# Altium PCB Nixie_PCB.PcbDoc
Units mm, origin at the board's own origin, x right, y up, seen from the top; angles counter-clockwise.
Board outline 150 x 55 mm, 2 copper layers (Top Layer, Bottom Layer); 35 components, 121 nets, 337 pads, 172 vias.
Unrouted connection lines stored in the file: 6.
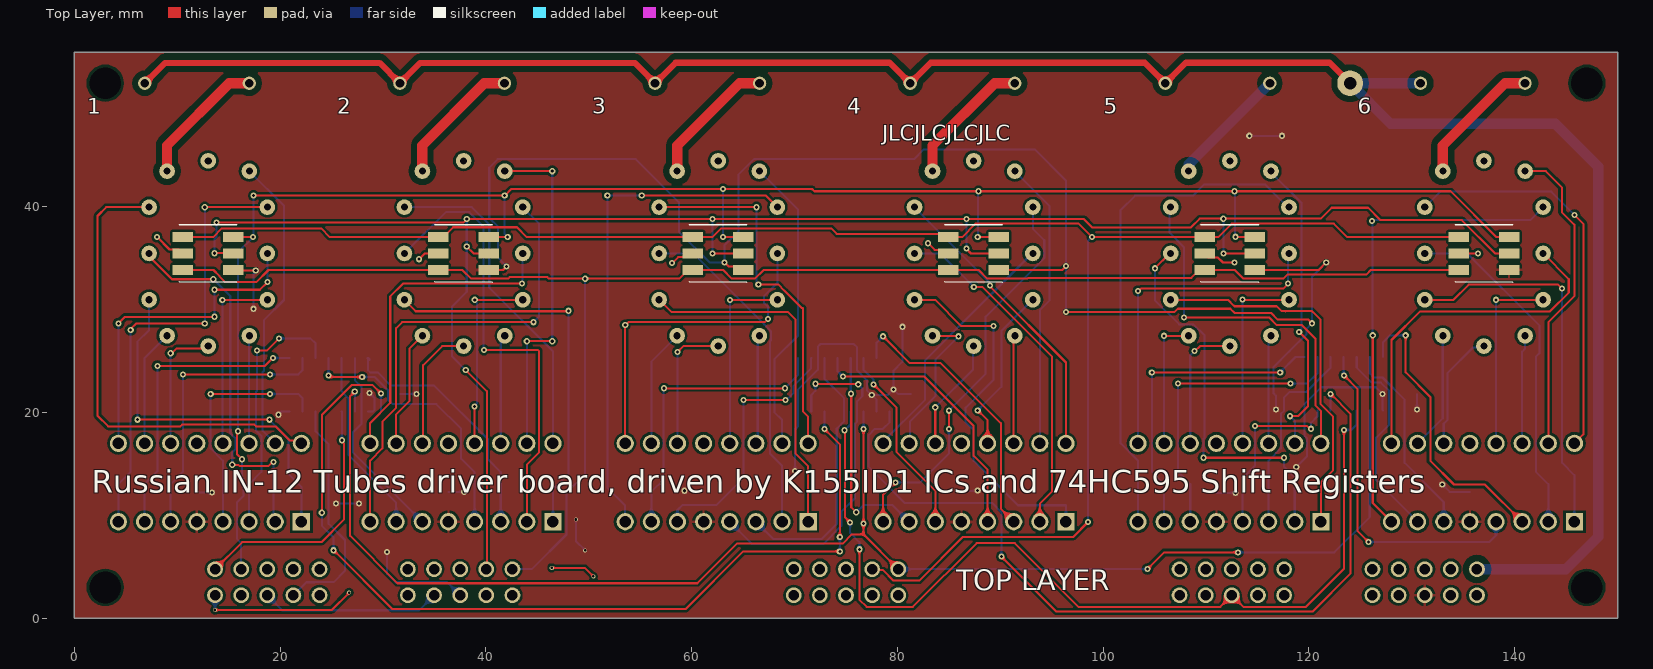
[diagram p0: Top Layer view]
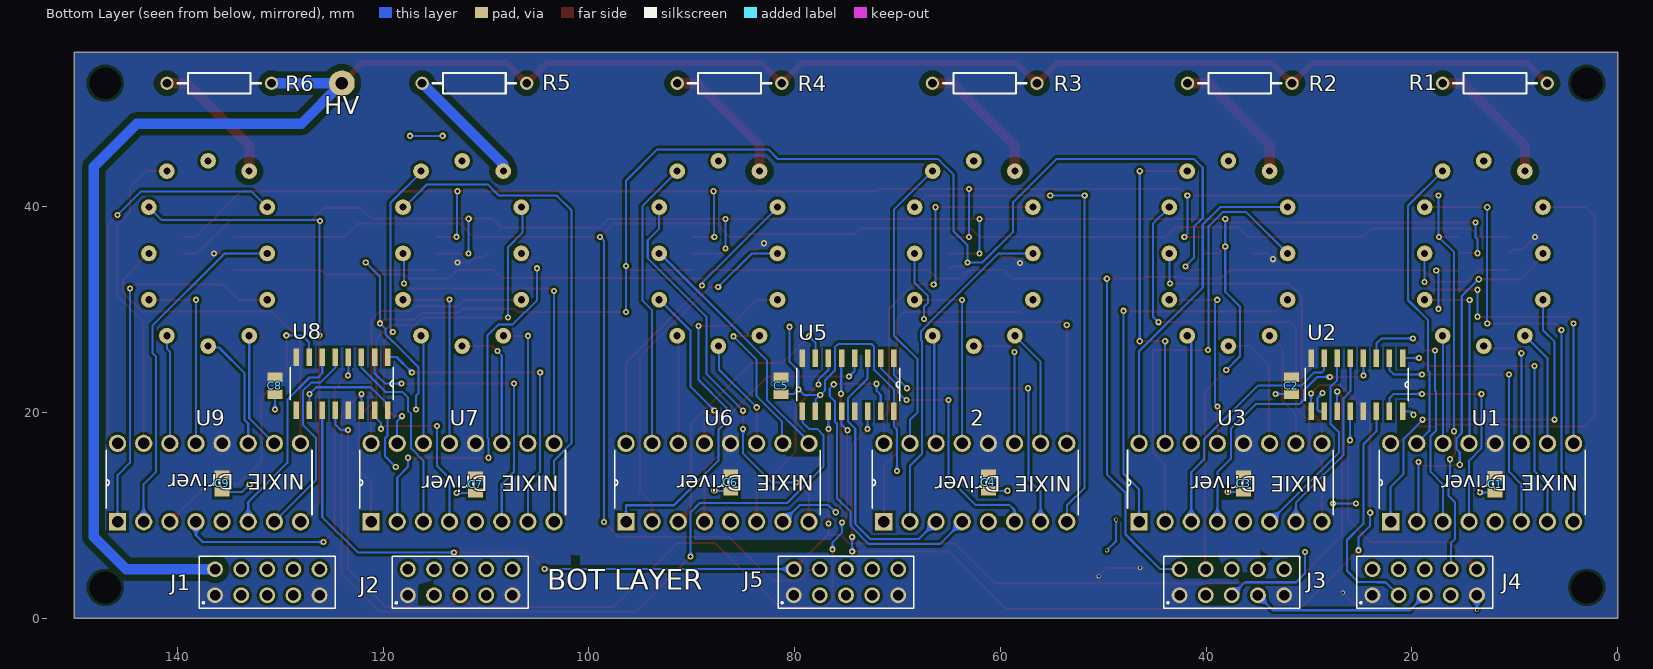
[diagram p1: Bottom Layer view, seen from below]
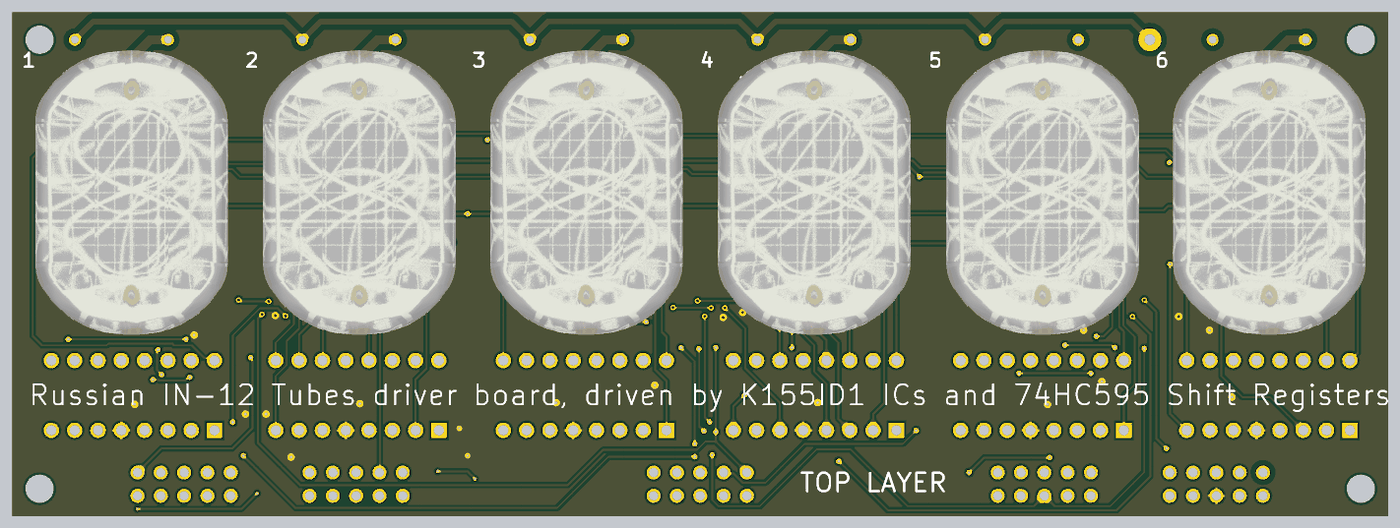
[diagram p2: 3D render of the assembled board from above, using the file's embedded part models]

## Layer stack, top to bottom
Top Solder: solder mask 0.0102, Solder Resist, Dk 3.5
Top Layer: signal copper 0.0356
Dielectric 1: dielectric 0.32, FR-4, Dk 4.8
Bottom Layer: signal copper 0.0356
Bottom Solder: solder mask 0.0102, Solder Resist, Dk 3.5

## Board outline
0,0 150,0 150,55 0,55

## Design rules (kind name [scope] priority, off if disabled: settings)
Clearance Clearance_1 [InNet('Net6_0') or InNet('HV ?') or InNet('Net5_0') Or InNet('Net4_0') or InNet('Net3_0') or InNet('Net2_0') or InNet('Net1_0')] p1: gap=0.6 ignorepadtopadclearanceinfootprint=FALSE
Clearance [All] p2: gap=0.25 ignorepadtopadclearanceinfootprint=FALSE except(0: Arc-Hole Track-Hole SMDPad-Hole THPad-Hole Via-Hole Fill-Hole Poly-Hole Region-Hole Text-Hole)
ComponentClearance ComponentClearance_C [InComponent('C1') or InComponent('C3') or InComponent('C4')or InComponent('C6') or InComponent('C7') or InComponent('C9') vs InComponent('U1') or InComponent('U3') or InComponent('U4')or InComponent('U6') or InComponent('U7') or InComponent('U9')] p1: gap=0.254 collisioncheckmode=3 verticalgap=0 showdistances=FALSE
ComponentClearance ComponentClearance_1 [All] p2: gap=0.254 collisioncheckmode=3 verticalgap=0.254 showdistances=FALSE
Height [All] p1: minheight=0 maxheight=35 prefheight=12.7
HoleSize [All] p1: absolutevalues=TRUE maxlimit=5 minlimit=0.025 maxpercent=80.000 minpercent=20.000
MinimumSolderMaskSliver [All] p1: minsoldermaskwidth=0.2
PolygonConnect PolygonConnect_Via [IsVia and InNet('VCC') or InNet('GND')] p1: connectstyle=Direct reliefconductorwidth=0.254 reliefentries=4 polygonreliefangle="90 Angle" airgapwidth=0.254
PolygonConnect [All] p2: connectstyle=Relief reliefconductorwidth=0.254 reliefentries=4 polygonreliefangle="90 Angle" airgapwidth=0.254
RoutingVias [All] p1: holewidth=0.25 width=0.4 viastyle="Through Hole" minholewidth=0.25 minwidth=0.4 maxholewidth=1.25 maxwidth=2
SolderMaskExpansion [All] p1: expansion=0.102 istentingtop=FALSE
Width [All] p1: maxlimit=1 minlimit=0.2 preferedwidth=0.2 minimp=50.000000 maximp=50.000000 favimp=50.000000
26 further rules are at their usual default settings.

## Components (designator, comment, footprint, x,y, rotation, side; value= is the part's Value field where it differs from the comment)
1 "Component_1" PCBComponent_3 7.258,35.458 r0 top
2 "Component_1" PCBComponent_3 32.083,35.458 r0 top
2 "ST232ABN" *DIP254P762X510-16 53.54,17 r90 bottom locked (schematic designator U4)
3 "Component_1" PCBComponent_3 56.833,35.458 r0 top
4 "Component_1" PCBComponent_3 81.658,35.458 r0 top
5 "Component_1" PCBComponent_3 106.558,35.458 r0 top
6 "Component_1" PCBComponent_3 131.258,35.458 r0 top
C1 "" *CAPC2013X90N 11.9,13.025 r90 bottom
C2 "" *CAPC2013X90N 31.7,22.6 r90 bottom
C3 "" *CAPC2013X90N 36.36,13.1 r90 bottom
C4 "" *CAPC2013X90N 61.16,13.2 r90 bottom
C5 "" *CAPC2013X90N 81.3,22.6 r90 bottom
C6 "" *CAPC2013X90N 86.2,13.2 r90 bottom
C7 "" *CAPC2013X90N 111,13 r90 bottom
C8 "" *CAPC2013X90N 130.5,22.6 r90 bottom
C9 "" *CAPC2013X90N 135.64,13.1 r90 bottom
J1 "61301021021" *61301021821 131.25,3.5 r180 bottom locked
J2 "61301021021" *61301021821 112.5,3.5 r180 bottom locked
J3 "61301021021" *61301021821 37.5,3.5 r180 bottom locked
J4 "61301021021" *61301021821 18.75,3.5 r180 bottom locked
J5 "61301021021" *61301021821 75,3.5 r180 bottom locked
R1 "f" AXIAL-0.4 11.92,52 r180 bottom locked value=18K
R2 "f" AXIAL-0.4 36.72,52 r180 bottom locked value=18K
R3 "f" AXIAL-0.4 61.52,52 r180 bottom locked value=18K
R4 "f" AXIAL-0.4 86.32,52 r180 bottom locked value=18K
R5 "f" AXIAL-0.4 111.12,52 r180 bottom locked value=18K
R6 "f" AXIAL-0.4 135.92,52 r180 bottom locked value=18K
U1 "ST232ABN" *DIP254P762X510-16 4.28,17 r90 bottom locked
U2 "74HC595D, shift reg" *SOIC127P600X175-16N 25.35,22.7 r270 bottom locked
U3 "ST232ABN" *DIP254P762X510-16 28.74,17 r90 bottom locked
U5 "74HC595D, shift reg" *SOIC127P600X175-16N 74.8,22.7 r270 bottom locked
U6 "ST232ABN" *DIP254P762X510-16 78.6,17 r90 bottom locked
U7 "ST232ABN" *DIP254P762X510-16 103.38,17 r90 bottom locked
U8 "74HC595D, shift reg" *SOIC127P600X175-16N 124,22.8 r270 bottom locked
U9 "ST232ABN" *DIP254P762X510-16 128.02,17 r90 bottom locked

## Footprints (in the part's own frame and the unit in brackets; to place one, negate y for a bottom-side part, rotate by r counter-clockwise, add the part's x,y. Pads: shape width x height; smd on the part's side, far side on the other; paste and mask are expansions set on the pad)
*61301021821 [mm]
  round 1.53 hole 1.02: 1(-5.08,-1.27) 2(-5.08,1.27) 3(-2.54,-1.27) 4(-2.54,1.27) 5(0,-1.27) 6(0,1.27) 7(2.54,-1.27) 8(2.54,1.27) 9(5.08,-1.27) 10(5.08,1.27)
  silkscreen extent -6.6,-2.54 6.6,2.54
*CAPC2013X90N [mil]
  rect 36x57 smd: 1(-32,0) 2(32,0)
*DIP254P762X510-16 [mil]
  rect 66x66 hole 44: 1(-300,700)
  round 66 hole 44: 2(-300,600) 3(-300,500) 4(-300,400) 5(-300,300) 6(-300,200) 7(-300,100) 8(-300,0) 9(0,0) 10(0,100) 11(0,200) 12(0,300) 13(0,400) 14(0,500) 15(0,600) 16(0,700)
  silkscreen extent -273,-44 -27,744
*SOIC127P600X175-16N [mil]
  rect 67x21 smd: 1(-102,175) 2(-102,125) 3(-102,75) 4(-102,25) 5(-102,-25) 6(-102,-75) 7(-102,-125) 8(-102,-175) 9(102,-175) 10(102,-125) 11(102,-75) 12(102,-25) 13(102,25) 14(102,75) 15(102,125) 16(102,175)
  silkscreen extent -62,-197 62,197, body extent -121,-198 121,198, height 79
AXIAL-0.4 [mm] "Axial Device, Thru-Hole; 2 Leads; 0.4 in Pin Spacing"
  round 1.3 hole 0.85: 1(-5.08,0) 2(5.08,0)
  silkscreen extent -4.06,-1.02 4.06,1.02
PCBComponent_3 [mm]
  round 1.524 hole 0.69: 0(1.75,8) 1(0,4.5) 2(0,0) 3(0,-4.5) 4(1.75,-8) 5(5.75,-9) 6(9.75,-8) 7(11.5,-4.5) 8(11.5,0) 9(11.5,4.5) 10(9.75,8) 11(5.75,9)
  rrect10% 2x1 smd: 12(8.192,-1.608) 13(8.192,-0.008) 14(8.192,1.592) 15(3.292,1.592) 16(3.292,-0.008) 17(3.292,-1.608)
  silkscreen extent 2.94,-2.78 8.54,2.77, body extent -4.74,-15.64 16.26,15.36, height 34.8

## Part data
2 U1 U3 U6 U7 U9: "Ic Drvr/Rcvr 5v Rs232 16-Dip"
C1 C2 C3 C4 C5 C6 C7 C8 C9: library part U0805R104KCT, "Capacitor, 0805, 100nf, 50v", Package="0805 Multicomp", Availability=Unavailable, MF=Multicomp, MP=U0805R104KCT, Price=None, SnapEDA_Link=https://www.snapeda.com/parts/U0805R104KCT/Multicomp/view-part/?ref=snap
J1 J2 J3 J4 J5: "2.54mm Pitch 10 Way 2 Row Right Angle Pin Header, Through Hole, Solder Pin Term", Package=None, Availability=Unavailable, MF="Wurth Electronics", MP=61301021021, Price=None, SnapEDA_Link=https://www.snapeda.com/parts/61301021021/Wurth%20Electronics%20Inc./view-part/?ref=snap
R1 R2 R3 R4 R5 R6: library part Res2, "Resistor", LatestRevisionDate=17-Jul-2002, LatestRevisionNote="Re-released for DXP Platform.", PackageDescription="Axial Device, Thru-Hole; 2 Leads; 0.4 in Pin Spacing", PackageReference=AXIAL-0.4, Published=8-Jun-2000, Publisher="Altium Limited"
U2 U5 U8: library part 74HC595D-Q100,118, "74HC_T_595-Q100 - 8-bit serial-in, serial or parallel-out shift register with output latches; 3-state"

## Free pads (board coordinates)
  round 1.524 hole 3.1 unplated: 2(3,3) 2(3,52) 2(147,3) 2(147,52)
  round 2.5 hole 1.2: 3(124,52)

## Via types
v1: diameter 0.6, hole 0.3, Top Layer to Bottom Layer, 166 vias
v2: diameter 0.4, hole 0.25, Top Layer to Bottom Layer, 6 vias

## Nets (pads, with @x,y where several pads share a name; then routed paths per layer and width w, separated by ;. In a path a pad name is that pad's centre, name@x,y a point inside that pad or via, vN(x,y) a via of type N, cw(c..) or ccw(c..) an arc to the next point about the centre after c; other vN are vias at no path point)
GND: 1.16 2.12@61.16,17 2.16@35.375,35.45 3.16 4.16 5.16 6.16 C1.2 C2.2 C3.2 C4.2 C5.2 C6.2 C7.2 C8.2 C9.2 J1.1 J1.9 J2.1 J2.9 J3.1 J3.9 J4.1 J4.9 J5.1 J5.9 U1.12 U2.8 U2.13 U3.12 U5.8 U5.13 U6.12 U7.12 U8.8 U8.13 U9.12 | length 34.8
  Top Layer w0.2: v1(8.036,37.05) 9.25,35.836 10.164,35.836 1.16 ; v2(13.664,0.8) 25.005,0.8 v2(26.7,2.495) ; v1(33.5,34.897) 34.053,35.45 2.16@35.375,35.45 ; v2(46.4,4.9) 49.62,4.9 v2(50.45,4.07) ; v1(58.102,34.519) 58.683,35.1 59.775,35.1 3.16 ; v1(82.984,36.444) 83.627,35.8 84.6,35.8 4.16 ; 5.16 110.237,35.063 111.15,35.063 111.64,34.574 v1(112.764,34.574) ; 6.16 v1(136.416,35.45)
  Bottom Layer w0.2: v2(13.664,0.8) 13.67,0.806 J4.9
"HV ⚡": J1.2 pad.3 R1.2 R2.2 R3.2 R4.2 R5.2 R6.2 | length 208.8
  Top Layer w0.6: R1.2 8.82,53.98 29.66,53.98 R2.2 33.62,53.98 54.46,53.98 R3.2 58.44,54 79.24,54 R4.2 83.24,54 104.04,54 R5.2 108.04,54 122,54 pad.3
  Bottom Layer w1: R6.2 pad.3 127.925,48.075 143.95,48.075 148.125,43.9 148.125,7.925 144.97,4.77 J1.2
Net1_0: 1.0 R1.1 | length 13
  Top Layer w1: 1.0@9,43.45 9,45.95 15.05,52 R1.1
Net1_1: 1.1 U1.16 | length 45.8
  Top Layer w0.2: 1.1@7.25,39.95 3.1,39.95 2.25,39.1 2.25,19.675 3.275,18.65 10.302,18.65 10.475,18.824 17.502,18.824 17.675,18.65 19.55,18.65 20.922,17.279 21.781,17.279 U1.16
Net1_2: 1.2 U1.2 | length 36.6
  Top Layer w0.2: 1.2 7.258,35.177 9.484,32.95 v1(13.5,32.95) ; v1(15.344,14.922) 15.373,14.893 15.944,14.893 16.031,14.806 18.883,14.806 19.252,15.175 v1(19.36,15.175)
  Bottom Layer w0.2: v1(13.5,32.95) 13.519,32.95 15.15,31.319 15.15,18 15.65,17.5 15.65,16.418 15.344,16.112 v1(15.344,14.922) ; v1(19.36,15.175) 19.36,9.54 U1.2
Net1_3: 1.3 U1.1 | length 36.1
  Top Layer w0.2: v1(6.125,19.3) v1(18.95,19.3)
  Bottom Layer w0.2: v1(6.125,19.3) 6.125,26.858 7.25,27.983 1.3@7.25,30.95 ; v1(18.95,19.3) 20.8,17.45 20.8,14.034 22.06,12.774 U1.1
Net1_4: 1.4 U1.10 | length 11.4
  Bottom Layer w0.2: U1.10 6.82,25.27 1.4@9,27.45
Net1_5: 1.5 U1.11 | length 12.7
  Top Layer w0.2: v1(9.362,25.757) 9.461,25.757 9.906,26.203 12.753,26.203 1.5@13,26.45
  Bottom Layer w0.2: U1.11 U1.11 9.361,25.756 v1(9.362,25.757)
Net1_6: 1.6 U1.14 | length 10.5
  Bottom Layer w0.2: U1.14 16.99,17.01 16.99,27.44 1.6@17,27.45
Net1_7: 1.7 U1.13 | length 18.3
  Top Layer w0.2: v1(14.378,30.928) 14.4,30.95 1.7@18.75,30.95
  Bottom Layer w0.2: v1(14.378,30.928) 14.409,30.897 14.409,17.031 U1.13
Net1_8: 1.8 U1.9 | length 32.1
  Top Layer w0.2: v1(4.275,28.65) 4.925,29.3 v1(13.625,29.3) ; v1(13.625,31.925) 18.025,31.925 v1(18.775,32.675)
  Bottom Layer w0.2: v1(4.275,28.65) 4.275,17.005 U1.9 ; v1(13.625,29.3) v1(13.625,31.925) ; 1.8 18.766,35.449 18.766,32.684 v1(18.775,32.675)
Net1_9: 1.9 U1.8 | length 44
  Top Layer w0.2: v1(5.475,28) 5.475,28.125 6,28.65 v1(12.675,28.65) ; v1(12.675,39.95) 1.9@18.75,39.95
  Bottom Layer w0.2: U1.8 4.28,13.042 5.475,14.237 v1(5.475,28) ; v1(12.675,28.65) v1(12.675,39.95)
Net1_10: 1.10 U1.15 | length 29.2
  Bottom Layer w0.2: 1.10 20.375,40.09 20.375,30.936 18.412,28.973 18.412,24.031 18.3,23.919 18.3,18.22 U1.15
Net2_0: 2.0 R2.1 | length 13
  Top Layer w1: 2.0@33.8,43.45 33.8,45.95 39.85,52 R2.1
Net2_1: 2.1@32.083,39.958 U3.16 | length 32.8
  Bottom Layer w0.2: 2.1@32.05,39.95 38.642,39.95 40.325,38.267 40.325,32.131 46.52,25.936 U3.16
Net2_2: 2.2@32.083,35.458 U3.2 | length 44.4
  Top Layer w0.2: v1(39.802,26.084) 45.058,26.084 45.175,25.966 45.175,16.125 43.98,14.93 U3.2
  Bottom Layer w0.2: 2.2@32.083,35.458 36.1,39.475 38.384,39.475 39.75,38.109 39.75,26.136 v1(39.802,26.084)
Net2_3: 2.3@32.083,30.958 U3.1 | length 37.6
  Top Layer w0.2: 2.3@32.05,30.95 33.162,29.838 47.984,29.838 v1(48.025,29.879)
  Bottom Layer w0.2: U3.1 46.52,12.52 48.025,14.025 v1(48.025,29.879)
Net2_4: 2.4@33.833,27.458 U3.10 | length 11.5
  Top Layer w0.2: U3.10 31.28,19.819 32.555,21.093 32.555,26.205 2.4@33.8,27.45
Net2_5: 2.5@37.833,26.458 U3.11 | length 12.3
  Top Layer w0.2: U3.11 33.893,17.073 33.893,24.597 35.745,26.45 2.5@37.8,26.45
Net2_6: 2.6@41.833,27.458 U3.14 | length 10.6
  Bottom Layer w0.2: U3.14 41.44,26.732 41.8,27.092 2.6@41.8,27.45
Net2_7: 2.7@43.583,30.958 U3.13 | length 18.8
  Top Layer w0.2: U3.13 v1(38.9,20.584) ; v1(38.912,30.95) 2.7@43.55,30.95
  Bottom Layer w0.2: v1(38.9,20.584) 38.9,20.648 39.152,20.901 39.152,30.633 38.912,30.873 v1(38.912,30.95)
Net2_8: 2.8@43.583,35.458 U3.9 | length 31.4
  Top Layer w0.2: U3.9 28.74,18.974 30.7,20.934 30.7,31.285 31.944,32.529 v1(43.509,32.529)
  Bottom Layer w0.2: v1(43.509,32.529) 43.546,32.566 43.546,35.444 2.8@43.551,35.449
Net2_9: 2.9@43.583,39.958 U3.8 | length 45.5
  Top Layer w0.2: U3.8 28.74,15.32 29.928,16.508 29.928,19.103 31.28,20.455 31.28,28.202 31.853,28.775 v1(44.625,28.775)
  Bottom Layer w0.2: 2.9@43.55,39.95 45.175,38.325 45.175,29.325 v1(44.625,28.775)
Net2_10: 2.10@41.833,43.458 U3.15 | length 33.6
  Top Layer w0.2: 2.10@41.8,43.45 v1(46.45,43.45) ; v1(43.975,26.925) v1(46.45,26.925)
  Bottom Layer w0.2: v1(43.975,26.925) 43.975,17.005 U3.15 ; v1(46.45,26.925) v1(46.45,43.45)
Net3_0: 3.0 R3.1 | length 13
  Top Layer w1: 3.0@58.6,43.45 58.6,45.95 64.65,52 R3.1
Net3_1: 2.16@71.32,17 3.1 | length 35.7
  Top Layer w0.2: 3.1@56.85,39.95 v1(66.307,39.95) ; v1(66.477,32.444) 68.406,32.444 69.012,31.838 cw(c68.333,30.958) 69.213,31.637 70.675,30.175 70.81,30.175 70.81,20.11 71.32,19.6 2.16@71.32,17
  Bottom Layer w0.2: v1(66.307,39.95) 66.307,32.722 66.477,32.552 v1(66.477,32.444)
Net3_2: 2.2@68.78,9.38 3.2 | length 33.1
  Bottom Layer w0.2: 3.2 60.155,35.458 67.043,28.57 67.695,27.918 67.695,26.997 67.592,26.894 67.592,16.008 68.78,14.82 2.2@68.78,9.38
Net3_3: 2.1@71.32,9.38 3.3 | length 34.2
  Top Layer w0.2: 3.3@56.85,30.95 58.05,29.75 69.38,29.75 70.1,29.03 70.1,16 71.32,14.78 2.1@71.32,9.38
Net3_4: 2.10@56.08,17 3.4 | length 11.5
  Bottom Layer w0.2: 2.10@56.08,17 56.08,24.93 3.4@58.6,27.45
Net3_5: 2.11@58.62,17 3.5 | length 13.1
  Top Layer w0.2: v1(58.62,25.88) 59.19,26.45 3.5@62.6,26.45
  Bottom Layer w0.2: 2.11@58.62,17 v1(58.62,25.88)
Net3_6: 2.14@66.24,17 3.6 | length 10.6
  Bottom Layer w0.2: 2.14@66.24,17 66.42,17.18 66.42,27.27 3.6@66.6,27.45
Net3_7: 2.13@63.7,17 3.7 | length 18.6
  Top Layer w0.2: v1(63.712,30.938) 63.718,30.944 68.344,30.944 3.7@68.35,30.95
  Bottom Layer w0.2: 2.13@63.7,17 63.712,17.012 v1(63.712,30.938)
Net3_8: 2.9@53.54,17 3.8 | length 32.7
  Top Layer w0.2: 2.9@53.54,17 v1(53.54,28.5) 53.582,28.5 53.857,28.775 67.115,28.775 67.432,29.092 v1(67.432,29.1)
  Bottom Layer w0.2: v1(67.432,29.1) 67.419,29.113 67.419,30.273 67.01,30.683 67.01,31.291 68.35,32.632 3.8@68.35,35.45
Net3_9: 2.8@53.54,9.38 3.9 | length 49.4
  Top Layer w0.2: v1(55.15,41.075) 67.225,41.075 3.9@68.35,39.95
  Bottom Layer w0.2: 2.8@53.54,9.38 53.54,10.96 51.8,12.7 v1(51.8,41.075) v1(55.15,41.075)
Net3_10: 2.15@68.78,17 3.10 | length 29.3
  Bottom Layer w0.2: 3.10@66.6,43.45 70.355,39.695 70.355,27.483 68.042,25.17 68.042,20.032 68.78,19.294 2.15@68.78,17
Net4_0: 4.0 R4.1 | length 13
  Top Layer w1: 4.0@83.4,43.45 83.4,45.95 89.45,52 R4.1
Net4_1: 4.1 U6.16 | length 29.1
  Top Layer w0.2: v1(89.007,32.35) 89.007,32.233 96.38,24.861 U6.16
  Bottom Layer w0.2: 4.1@81.65,39.95 88.925,32.675 88.925,32.432 v1(89.007,32.35)
Net4_2: 4.2 U6.2 | length 34.1
  Top Layer w0.2: v1(87.425,32.2) 88.238,32.2 95.032,25.406 95.032,12.332 93.84,11.14 U6.2
  Bottom Layer w0.2: 4.2@81.65,35.45 84.175,35.45 v1(87.425,32.2)
Net4_3: 4.3 U6.1 | length 35.6
  Top Layer w0.2: 4.3@81.65,30.95 83.66,30.95 86.22,28.39 v1(89.322,28.39)
  Bottom Layer w0.2: v1(89.322,28.39) 89.322,23.155 86.633,20.466 86.633,19.067 87.408,18.292 87.408,16.4 87.4,16.392 87.4,15.3 91.72,10.98 96.38,10.98 U6.1
Net4_4: 4.4 U6.10 | length 15
  Top Layer w0.2: 4.4@83.4,27.45 85.9,27.45 v1(85.947,27.403)
  Bottom Layer w0.2: U6.10 81.238,17.098 81.238,19.138 83.68,21.58 83.68,25.136 v1(85.947,27.403)
Net4_5: 4.5 U6.11 | length 10.2
  Top Layer w0.2: v1(83.675,20.5) 83.675,17.005 U6.11
  Bottom Layer w0.2: v1(83.675,20.5) 87.35,24.175 4.5@87.35,25.7
Net4_6: 4.6 U6.14 | length 10.5
  Top Layer w0.2: U6.14 91.3,27.35 4.6@91.4,27.45
Net4_7: 4.7 U6.13 | length 16.6
  Top Layer w0.2: v1(87.8,20.2) 88.76,19.24 U6.13
  Bottom Layer w0.2: v1(87.8,20.2) 90.1,22.5 90.1,27.921 93.129,30.95 4.7@93.15,30.95
Net4_8: 4.8 U6.9 | length 24.5
  Bottom Layer w0.2: U6.9 78.6,17.136 82.7,21.236 82.7,25.066 85.2,27.566 85.2,27.575 93.075,35.45 4.8@93.15,35.45
Net4_9: 4.9 U6.8 | length 38.9
  Top Layer w0.2: U6.8 78.6,12 v1(79.8,13.2) ; v1(85,18.4) v1(85,20.175)
  Bottom Layer w0.2: v1(79.8,13.2) 82.2,13.2 85,16 v1(85,18.4) ; v1(85,20.175) 88.575,23.75 88.575,29.302 89.298,30.025 94.27,34.997 94.27,36.742 93.158,37.854 4.9
Net4_10: 4.10 U6.15 | length 28.3
  Bottom Layer w0.2: 4.10@91.4,43.45 94.8,40.05 94.8,30.89 93.84,29.93 U6.15
Net5_0: 5.0 R5.1 | length 11.9
  Bottom Layer w1: 5.0@108.2,43.45 108.3,43.55 108.3,44.125 116.175,52 R5.1
Net5_1: 5.1 U7.16 | length 35.3
  Top Layer w0.2: v1(107.855,29.226) 116.122,29.226 116.83,28.519 119.276,28.519 120.65,27.144 120.65,20.66 121.16,20.15 U7.16
  Bottom Layer w0.2: 5.1@106.45,39.95 106.45,37.478 107.855,36.073 v1(107.855,29.226)
Net5_2: 5.2 U7.2 | length 37.8
  Top Layer w0.2: v1(105.025,34.009) 105.025,34.025 5.2@106.45,35.45 ; v1(109.75,15.6) v1(117.58,15.6)
  Bottom Layer w0.2: v1(105.025,34.009) 105.025,30.918 107.373,28.57 108.768,28.57 109.85,27.488 109.85,17.53 109.75,17.43 v1(109.75,15.6) ; v1(117.58,15.6) 117.58,14.7 118.62,13.66 U7.2
Net5_3: 5.3 U7.1 | length 36.1
  Top Layer w0.2: 5.3@106.45,30.95 112.125,30.95 112.695,30.38 112.753,30.322 116.86,30.322 117.335,29.847 ccw(c117.718,39.489) 118.102,29.847 120.303,29.847 120.362,29.788 121.1,29.05 121.1,20.846 122.348,19.598 122.348,14.399 121.16,13.211 U7.1
Net5_4: 5.4 U7.10 | length 12.7
  Top Layer w0.2: v1(105.92,27.45) 5.4@108.2,27.45
  Bottom Layer w0.2: U7.10 v1(105.92,27.45)
Net5_5: 5.5 U7.11 | length 12.7
  Top Layer w0.2: v1(108.888,25.984) 108.946,25.984 109.412,26.45 5.5@112.2,26.45
  Bottom Layer w0.2: U7.11 108.46,25.555 v1(108.888,25.984)
Net5_6: 5.6 U7.14 | length 10.6
  Bottom Layer w0.2: U7.14 116.08,27.23 5.6
Net5_7: 5.7 U7.13 | length 18.4
  Top Layer w0.2: v1(113.54,30.972) 113.674,30.92 117.92,30.92 5.7@117.95,30.95
  Bottom Layer w0.2: U7.13 v1(113.54,30.972)
Net5_8: 5.8 U7.9 | length 32.6
  Top Layer w0.2: v1(103.38,31.8) 103.435,31.8 103.705,32.07 117.54,32.07 v1@117.95,32.48
  Bottom Layer w0.2: U7.9 v1(103.38,31.8) ; v1(117.95,32.525) 5.8@117.95,35.45
Net5_9: 5.9 U7.8 | length 49.2
  Bottom Layer w0.2: U7.8 103.38,15.32 101.7,17 101.7,39.675 103.1,41.075 108.725,41.075 109.822,42.172 115.728,42.172 116.826,41.074 5.9@117.95,39.95
Net5_10: 5.10 U7.15 | length 29.6
  Top Layer w0.2: v1(118.159,19.637) 118.937,19.637 119.909,20.609 119.909,26.966 v1(119.05,27.825)
  Bottom Layer w0.2: 5.10@116.2,43.45 119.288,40.362 119.288,28.142 119.05,27.904 v1(119.05,27.825) ; v1(118.159,19.637) 118.625,19.17 118.625,17.005 U7.15
Net6_0: 6.0 R6.1 | length 13
  Top Layer w1: 6.0@133,43.45 133,45.95 139.05,52 R6.1
Net6_1: 6.1 U9.16 | length 39
  Top Layer w0.2: U9.16 146.675,17.875 146.675,38.325 v1(145.8,39.2)
  Bottom Layer w0.2: 6.1@131.25,39.95 132.771,41.471 143.554,41.471 v1@145.8,39.225
Net6_2: 6.2 U9.2 | length 33.8
  Bottom Layer w0.2: 6.2@131.25,35.45 135.4,35.45 142.389,28.461 142.389,25.739 142.05,25.399 142.05,14.25 143.26,13.04 U9.2
Net6_3: 6.3 U9.1 | length 37.3
  Top Layer w0.2: 6.3@131.25,30.95 134.05,30.95 135.527,32.427 144.223,32.427 v1(144.6,32.05)
  Bottom Layer w0.2: v1(144.6,32.05) 144.6,15.1 145.8,13.9 U9.1
Net6_4: 6.4 U9.10 | length 11.5
  Bottom Layer w0.2: U9.10 133,19.44 6.4@133,27.45
Net6_5: 6.5 U9.11 | length 11.6
  Bottom Layer w0.2: U9.11 133.1,18.904 133.45,19.254 133.45,23.825 135.938,26.313 136.863,26.313 6.5@137,26.45
Net6_6: 6.6 U9.14 | length 10.6
  Bottom Layer w0.2: U9.14 140.72,25.92 141,26.2 6.6@141,27.45
Net6_7: 6.7 U9.13 | length 18.5
  Top Layer w0.2: v1(138.18,30.95) 6.7@142.75,30.95
  Bottom Layer w0.2: U9.13 v1(138.18,30.95)
Net6_8: 6.8 U9.9 | length 34
  Top Layer w0.2: U9.9 128.02,27.045 130.8,29.825 143.425,29.825 145.25,31.65 145.25,32.965 6.8
Net6_9: 6.9 U9.8 | length 47.2
  Top Layer w0.2: v1(126.2,27.5) 126.2,11.2 U9.8
  Bottom Layer w0.2: v1(126.128,38.603) 126.164,38.567 126.164,27.536 v1(126.2,27.5) ; v1@126.212,38.603 126.212,38.687 126.225,38.7 141.5,38.7 6.9@142.75,39.95
Net6_10: 6.10 U9.15 | length 30.7
  Top Layer w0.2: 6.10@141,43.45 143.025,43.45 144.588,41.887 144.588,39.462 145.8,38.25 145.8,31.3 143.26,28.76 U9.15
Net_1: J1.10
Net_2: J1.8
Net_3: J1.6
Net_4: J1.4
Net_6: J2.8
Net_7: J2.6
Net_8: J2.4
Net_9: J2.2
Net_10: J3.10
Net_11: J3.8
Net_12: J3.6
Net_13: J4.10 U2.12 | length 25.1
  Top Layer w0.2: J4.10 16.3,7.4 24.02,7.4 26.2,9.58 26.2,16.992 26,17.192 v1(26,17.3)
  Bottom Layer w0.2: U2.12 26,20.094 v1(26,17.3)
Net_14: J4.6
Net_15: J4.4
Net_16: J4.2
Net_17: J5.10
Net_18: J5.8
Net_19: J5.6
Net_20: J5.2 U2.11 U5.11 U8.11 | length 145.1
  Top Layer w0.2: v1(27.255,22.037) 26.8,21.582 26.8,8 31.4,3.4 60.549,3.4 64.395,7.246 74.665,7.246 75.569,8.15 76.7,8.15 ; v1@76.595,9.195 v1(76.7,9.195) ; v1(76.7,18.4) v1(76.7,9.195) ; J5.2 76.7,8.15 ; v1(104.3,4.77) 105.93,6.4 v1(113.1,6.4) ; 76.7,8.15 v1(76.7,9.195)
  Bottom Layer w0.2: U2.11 v1(27.255,22.037) ; v1(76.7,18.4) 76.705,18.405 U5.11 ; J5.2 v1(104.3,4.77) ; v1(113.1,6.4) 122.471,6.4 125.905,9.834 U8.11
Net_22: J2.5 U5.12 U8.12 | length 90.5
  Top Layer w0.2: v1(74.861,18.275) 74.9,18.236 74.9,9.8 v1(75.4,9.3) ; v1(76.3,6.7) 76.3,1.8 77,1.1 81.5,1.1 87.7,7.3 91.4,7.3 97.589,1.111 111.381,1.111 J2.5 113.619,1.111 119.711,1.111 123.4,4.8 v1(123.4,18.3)
  Bottom Layer w0.2: v1(74.861,18.275) 74.875,18.275 75.435,18.835 U5.12 ; v1(75.4,9.3) 75.4,8.3 76.3,7.4 v1(76.3,6.7) ; v1(123.4,18.3) 124.1,18.3 124.635,18.835 U8.12
Net_23: J3.7 J4.5 | length 17.4
  Bottom Layer w0.2: J4.5 20.205,0.775 33.505,0.775 J3.7
Net_24: J4.3 U2.14 | length 22.7
  Bottom Layer w0.2: J4.3 22.56,3.5 23.323,3.5 23.332,3.509 25.209,3.509 26.3,4.6 26.3,7.6 24.715,9.185 24.715,16.887 23.445,18.157 U2.14
Net_25: J3.4 | length 191.1
  Top Layer w0.2: v1(13.621,35.479) 15.421,35.479 15.45,35.45 ; v1(13.8,38.45) 37.79,38.45 v1(38.14,38.8) v1(62.017,38.8) 98.125,38.8 98.95,37.975 108.508,37.975 109.379,38.846 121.146,38.846 122.201,39.9 125.75,39.9 126.95,38.7 134.866,38.7 138.116,35.45 139.45,35.45 ; v1@38.035,24.115 40.088,22.062 40.088,4.818 J3.4 ; v1(38.14,36.125) 38.815,35.45 40.275,35.45 ; v1@62.017,35.458 62.025,35.45 65.025,35.45 ; v1@86.7,35.9 87.15,35.45 89.85,35.45 ; v1@111.675,35.458 v1(111.683,35.45) 114.75,35.45
  Bottom Layer w0.2: v1(13.621,35.479) 13.621,36.837 13.8,37.016 v1(13.8,38.45) ; v1(38.038,24.118) 36.721,25.435 36.721,30.297 38.14,31.716 v1(38.14,36.125) v1(38.14,38.8) ; v1(62.017,35.449) v1(62.017,38.8) ; v1(86.7,35.95) v1(86.7,38.8) ; v1(111.675,38.825) 111.679,38.821 111.679,35.454 v1(111.683,35.45)
Net_26: 1.14 2.14@40.275,37.05 3.14 4.14 5.14 6.14 J4.8 | length 189.4
  Top Layer w0.2: 1.14 v1(17.375,37.05) ; v1(15.896,18.174) 15.896,18.065 15.792,17.962 15.792,15.964 v1(16.3,15.456) ; v1@17.375,41.05 v1(17.405,41.08) v1(41.824,41.08) 42.47,41.725 v1(63.059,41.725) 71.7,41.725 71.925,41.5 133.775,41.5 138.225,37.05 6.14 ; 2.14@40.275,37.05 40.28,37.055 v1(42.117,37.055) ; v1(63.059,37.055) 63.064,37.05 3.14 ; v1(87.8,37.05) 4.14 ; v1(112.843,37.075) 112.868,37.05 5.14
  Bottom Layer w0.2: v1(15.896,18.174) 15.896,35.571 v1(17.375,37.05) 17.39,37.065 17.39,41.065 v1(17.405,41.08) ; J4.8 16.21,7.292 15.792,7.71 15.792,11.251 16.425,11.884 16.425,13.554 16.3,13.679 v1(16.3,15.456) ; v1(41.824,41.08) 41.824,37.351 v1@42.125,37.05 ; v1(63.059,37.055) v1(63.059,41.725) ; v1(87.8,37.05) 87.838,37.088 87.838,41.467 v1(87.876,41.505) ; v1(112.776,41.505) 112.81,41.471 112.81,37.109 v1(112.843,37.075)
Net_27: 1.15 2.15@35.375,37.05 3.15 4.15 5.15 6.15 J5.4 | length 180
  Top Layer w0.2: 1.15 13.484,37.05 14.334,37.9 23.98,37.9 24.83,37.05 35.375,37.05 35.875,37.05 36.825,38 43.025,38 43.975,37.05 3.15 62.017,37.05 62.867,37.9 73.555,37.9 74.093,37.362 84.638,37.362 4.15 86.282,37.05 87.582,38.35 97.616,38.35 98.916,37.05 5.15 111.182,37.05 112.482,38.35 122.416,38.35 123.716,37.05 6.15 ; J5.4 77.642,4.668 78.605,4.668 79.618,3.655 82.107,3.655 86.352,7.9 97.071,7.9 v1(98.525,9.354)
  Bottom Layer w0.2: v1(98.525,9.354) 98.525,36.675 v1(98.9,37.05)
Net_28: 1.17 2.17 3.17 4.17 5.17 6.17 J3.2 | length 160.2
  Top Layer w0.2: 1.17 13.519,33.85 14.1,33.269 14.1,33.234 14.659,32.675 17.694,32.675 18.869,33.85 2.17 37.713,33.85 38.563,33 42.163,33 42.342,33.179 45.942,33.179 46.121,33 58.775,33 59.625,33.85 3.17 63.059,33.85 63.909,33 66.141,33 66.991,33.85 4.17 87.884,33.85 88.734,33 92.625,33 92.7,33.075 108.575,33.075 109.35,33.85 5.17 112.784,33.85 113.634,33 117.506,33 117.906,33.4 125.553,33.4 126.003,33.85 6.17
  Bottom Layer w0.2: J3.2 44.47,4.77 47.835,8.135 47.835,12.2 49.648,14.013 49.648,32.998 v1(49.65,33)
NetU1_3: U1.3 U2.3 | length 25.2
  Top Layer w0.2: v1(17.762,26.017) 18.717,26.017 v1(19.9,27.2)
  Bottom Layer w0.2: U1.3 16.98,13.042 18.168,14.23 18.168,17.715 17.65,18.234 17.65,22.015 17.762,22.127 v1(17.762,26.017) ; v1(19.9,27.2) 22.945,27.2 23.445,26.7 U2.3
NetU1_4: U1.4 U2.15 | length 23.5
  Top Layer w0.2: v1@13.047,21.8 v1(13.25,21.8) v1(19,21.8)
  Bottom Layer w0.2: v1@13.252,21.8 13.252,16.508 14.44,15.32 U1.4 ; v1(19,21.8) 21.762,21.8 22.175,21.387 U2.15
NetU1_6: U1.6 U2.2 | length 27.9
  Top Layer w0.2: v1@10.4,23.675 v1(10.55,23.675) 18.975,23.675 v1(19,23.7)
  Bottom Layer w0.2: U1.6 9.36,13.042 10.548,14.23 v1(10.55,23.675) ; v1(19,23.7) 21.775,23.7 22.175,24.1 U2.2
NetU1_7: U1.7 U2.1 | length 28.8
  Top Layer w0.2: v1(8.065,24.525) 18.525,24.525 v1(19.291,25.291)
  Bottom Layer w0.2: U1.7 6.82,13.042 8.065,14.286 v1(8.065,24.525) ; v1(19.291,25.291) U2.1
NetU2_4: U2.4 U3.4 | length 26.8
  Top Layer w0.2: v1(24.7,23.6) 24.856,23.444 24.863,23.45 v1(27.975,23.45)
  Bottom Layer w0.2: v1(24.7,23.6) 24.7,25.276 U2.4 ; v1(27.975,23.45) 29.199,23.45 30.485,22.163 30.485,21.264 30.936,20.813 35.187,20.813 37.6,18.4 37.6,15.5 38.9,14.2 U3.4
NetU2_5: U2.5 U3.7 | length 18.1
  Bottom Layer w0.2: U2.5 25.985,22.045 26.638,21.392 26.638,19.113 26.65,19.102 26.65,15.85 31.28,11.22 U3.7
NetU2_6: U2.6 U3.6 | length 19.3
  Bottom Layer w0.2: U2.6 27.255,23.142 27.905,22.492 27.905,19.117 27.909,19.113 27.909,18.909 27.1,18.1 27.1,16.1 U3.6
NetU2_7: U2.7 U3.3 | length 24.3
  Bottom Layer w0.2: U2.7 28.532,25.283 28.532,24.118 28.75,23.9 29.475,23.9 30.769,22.606 34.975,22.606 40.2,17.38 40.2,15.44 41.44,14.2 U3.3
  Bottom Layer w0.254: U2.7@28.532,25.283 U2.7@28.665,25.151
NetU2_9: U2.9 U5.14 | length 91.1
  Top Layer w0.2: v1(24.05,10.25) 24.05,19.751 26.986,22.687 28.963,22.687 v1(29.8,21.85) ; v1(25.2,6.6) 30.9,0.9 59.411,0.9 65.011,6.5 v1(74.4,6.5) ; v1(72.9,18.4) 74.4,16.9 v1(74.4,7.9)
  Bottom Layer w0.2: v1(24.05,10.25) 24.05,9 25.2,7.85 v1(25.2,6.6) ; U2.9 29.8,20.114 29.795,20.119 29.8,20.124 v1(29.8,21.85) ; U5.14 72.895,18.405 v1(72.9,18.4) ; v1@74.2,7.9 74.4,7.7 v1(74.4,6.5) ; v1@74.2,7.9 v1(74.4,7.9)
NetU4_3: 2.3@66.24,9.38 U5.3 | length 26.4
  Bottom Layer w0.2: 2.3@66.24,9.38 67.92,7.7 72.644,7.7 74.1,9.156 74.1,18.433 74.571,18.904 74.578,18.904 74.786,19.112 74.786,21.414 72.895,23.305 U5.3
NetU4_4: 2.4@63.7,9.38 U5.15 | length 34.3
  Top Layer w0.2: v1(72.025,22.789) 72.052,22.763 76.16,22.763 v1(76.187,22.736)
  Bottom Layer w0.2: 2.4@63.7,9.38 65.88,7.2 72.781,7.2 74.554,8.973 74.554,10.354 75.885,11.685 75.885,18.91 76.088,19.113 76.088,21.105 76.579,21.595 76.579,22.344 v1(76.187,22.736) ; U5.15 71.625,21.7 72.025,22.1 v1(72.025,22.789)
NetU4_6: 2.6@58.62,9.38 U5.2 | length 25.7
  Top Layer w0.2: v1(65.025,21.2) v1(69.114,21.2)
  Bottom Layer w0.2: 2.6@58.62,9.38 58.62,10.52 59.1,11 62.4,11 65.025,13.625 v1(65.025,21.2) ; v1(69.114,21.2) 69.2,21.2 69.905,21.905 69.905,22.579 71.583,24.257 71.583,25.249 U5.2
NetU4_7: 2.7@56.08,9.38 U5.1 | length 28.7
  Top Layer w0.2: v1(57.325,22.35) 69.05,22.35 v1(69.056,22.356)
  Bottom Layer w0.2: 2.7@56.08,9.38 56.08,12.28 57.275,13.475 v1@57.275,22.35 ; v1(69.056,22.356) 69.056,22.367 70.355,23.666 U5.1
NetU5_4: U5.4 U6.4 | length 26.6
  Top Layer w0.2: v1(74.7,23.5) 82.594,23.5 87.412,18.682 87.412,15.788 88.76,14.44 U6.4
  Bottom Layer w0.2: U5.4 74.165,24.035 v1(74.7,23.5)
NetU5_5: U5.5 U6.7 | length 21.3
  Top Layer w0.2: v1(75.486,21.82) 75.511,21.795 75.511,10.789 v1(76,10.3)
  Bottom Layer w0.2: U5.5 75.46,25.265 75.46,21.846 v1(75.486,21.82) ; v1(76,10.3) 76.7,11 79.52,11 U6.7
NetU5_6: U5.6 U6.6 | length 18.8
  Top Layer w0.2: v1(77.679,22.721) 79.9,20.5 79.9,16.18 83.68,12.4 U6.6
  Bottom Layer w0.2: U5.6 76.705,24.14 77.679,23.166 v1(77.679,22.721)
NetU5_7: U5.7 U6.3 | length 27.4
  Top Layer w0.2: v1(78.6,27.4) 81.2,24.8 84.202,24.8 90.05,18.952 90.05,10.63 U6.3
  Bottom Layer w0.2: U5.7 77.975,26.775 v1(78.6,27.4)
NetU5_9: U5.9 U8.14 | length 83.3
  Top Layer w0.2: v1(90.1,6) 95.443,0.657 120.357,0.657 124.054,4.354 124.054,19.846 v1(122.1,21.8)
  Bottom Layer w0.2: U5.9 79.245,19.045 78.6,18.4 77.8,18.4 77.2,17.8 77.2,14.728 80.728,11.2 89.2,11.2 90.1,10.3 v1(90.1,6) ; U8.14 122.1,20.214 v1(122.1,21.8)
NetU7_3: U7.3 U8.3 | length 19.5
  Bottom Layer w0.2: U7.3 116.08,15.32 117.268,16.508 117.268,19.865 117.58,20.176 117.58,21.465 118.092,21.977 119.711,21.977 122.09,24.357 122.09,25.386 U8.3
NetU7_4: U7.4 U8.15 | length 17.4
  Top Layer w0.2: v1(114.75,18.675) 119.821,18.675 120.087,18.409 v1(120.195,18.409)
  Bottom Layer w0.2: U7.4 113.54,13.622 114.75,14.832 v1(114.75,18.675) ; v1(120.195,18.409) 120.209,18.424 120.209,19.009 120.825,19.625 U8.15
NetU7_6: U7.6 U8.2 | length 29.5
  Top Layer w0.2: v1(107.275,22.8) v1(118.2,22.8)
  Bottom Layer w0.2: v1@107.291,22.8 107.272,22.781 107.272,14.23 108.46,13.042 U7.6 ; v1(118.2,22.8) 119.8,22.8 120.825,23.825 U8.2
NetU7_7: U7.7 U8.1 | length 30.5
  Top Layer w0.2: v1(104.725,23.9) v1(117.2,23.9)
  Bottom Layer w0.2: v1@104.775,23.9 104.732,23.857 104.732,14.23 105.92,13.042 U7.7 ; v1(117.2,23.9) 118.691,25.391 U8.1
NetU8_4: U8.4 U9.4 | length 33
  Top Layer w0.2: v1(123.4,23.6) 124.7,22.3 124.7,8.5 v1(125.8,7.4)
  Bottom Layer w0.2: U8.4 123.365,23.635 v1(123.4,23.6) ; v1(125.8,7.4) 137.5,7.4 138.18,8.08 U9.4
NetU8_5: U8.5 U9.7 | length 20
  Bottom Layer w0.2: U8.5 124.643,25.383 124.643,24.357 126.1,22.9 126.994,22.9 127.792,22.103 127.792,18.82 126.522,17.55 126.522,13.418 U9.7
NetU8_6: U8.6 U9.6 | length 19.5
  Bottom Layer w0.2: U8.6 125.905,23.8 126.305,23.4 127.145,23.4 129.3,21.245 129.3,15.1 133.1,11.3 U9.6
NetU8_7: U8.7 U9.3 | length 28.5
  Top Layer w0.2: v1(129.4,27.5) 129.4,23.9 131.8,21.5 131.8,15.3 134.1,13 137.1,13 U9.3
  Bottom Layer w0.2: U8.7 127.175,26.8 127.875,27.5 v1(129.4,27.5)
VCC: 1.12 1.13 2.5@61.16,9.38 2.12@40.275,33.85 2.13@40.275,35.45 3.12 3.13 4.12 4.13 5.12 5.13 6.12 6.13 C1.1 C2.1 C3.1 C4.1 C5.1 C6.1 C7.1 C8.1 C9.1 J1.5 J3.5 U1.5 U2.10 U2.16 U3.5 U5.10 U5.16 U6.5 U7.5 U8.10 U8.16 U9.5 | length 248.9
  Top Layer w0.2: 1.12 15.489,33.811 v1(17.629,33.811) ; 2.12@40.275,33.85 41.659,33.85 v1(41.989,34.18) ; v1(63.194,34.587) 63.581,34.2 64.675,34.2 3.12 ; 4.12 96.006,33.85 v1(96.38,34.224) ; v1(96.38,29.773) 106.945,29.773 107.252,30.08 112.359,30.08 112.762,29.676 116.309,29.676 116.935,29.05 119.909,29.05 v1(120.293,28.666) ; 5.12 120.941,33.85 v1(121.678,34.587)
  Bottom Layer w0.2: C1.1 v1(13.374,12.212) ; v1(17.425,30.074) 17.425,33.499 17.629,33.703 v1(17.629,33.811) ; v1(19.843,19.774) 20.179,20.109 U2.16 ; v1(25.439,11.15) v1(27.68,11.15) ; U2.10 29.028,20.109 29.154,20.235 29.154,21.446 v1(28.7,21.9) ; v1(30.4,6.452) 30.4,4.322 31.222,3.5 36.23,3.5 J3.5 ; C2.1 31.713,21.8 v1(33.243,21.8) ; C3.1 v1(37.893,12.287) ; v1(41.989,34.18) 41.989,34.241 41.182,35.048 41.182,38.046 40.325,38.903 40.325,43.803 41.147,44.625 54.569,44.625 58.759,40.435 58.759,37.559 61.731,34.587 v1(63.194,34.587) 63.194,36.27 64.559,37.635 64.559,43.138 66.045,44.625 81.614,44.625 82.559,45.57 93.339,45.57 96.38,42.528 v1(96.38,34.224) v1(96.38,29.773) ; v2(48.743,9.6) 48.743,7.505 v2(49.648,6.6) ; v1(59.3,12.387) C4.1 ; v1(70.047,14.3) 70.047,18.347 70.355,18.655 U5.16 70.355,22.247 72.26,24.152 72.26,26.392 72.522,26.653 75.768,26.653 76.052,26.369 76.052,24.126 77.029,23.149 77.029,22.169 v1(77.502,21.696) ; U5.10 77.975,21.223 v1(77.502,21.696) ; v1(80.477,28.325) 80.477,24.911 79.614,24.047 v1(79.614,22.242) ; C5.1 80.068,21.787 v1(79.614,22.242) ; C6.1 87.787,12.387 v1(87.8,12.4) ; C7.1 v1(112.862,12.187) ; v1(114.2,46.888) v1(117.389,46.888) ; v1(116.784,20.3) 116.784,21.627 116.55,21.861 116.55,24.406 118.092,25.948 119.768,27.624 119.768,28.14 v1(120.293,28.666) 120.293,33.202 v1(121.678,34.587) ; v1(118.763,14.7) 119.808,15.745 119.808,17.492 119.545,17.755 119.545,18.794 119.555,18.804 119.555,20.793 121.212,22.45 126.492,22.45 v1(127.142,21.8) 127.158,21.783 127.158,20.226 U8.10 ; v1(130.5,20.3) C8.1 ; v1(132.951,13.008) 133.671,12.287 C9.1 ; v1(77.502,21.696) 79.068,21.696 v1(79.614,22.242)
pads on no net: 1.11 2.11@37.833,44.458 3.11 4.11 5.11 6.11 J1.3 J1.7 J2.3 J2.7 J2.10 J3.3 J4.7 J5.3 J5.5 J5.7 U8.9

## Polygon pours and split planes (outlines as drawn)
VCC on Top Layer "VCC_L01_P000" (solid, pour order 0): 0,55 0,0 150,0 150,55
GND on Bottom Layer "GND_L02_P001" (solid, pour order 1): 0,55 0,0 150,0 150,55

## Other copper
Bottom Layer:
  pour cut-out: 26.502,26.392 28.008,26.392 28.008,26.25 26.5,26.25
  pour cut-out: 122.612,26.492 125.388,26.492 125.4,26.325 122.6,26.325
  pour cut-out: 37.5,1.206 37.535,1.241 40.305,1.241 40.305,2.989 40.011,3.283 37.045,3.283
  pour cut-out: 76.515,6.182 76.756,6.423 89.743,6.423 89.743,7.623 89.773,7.652 76.552,7.652
  pour cut-out: 116.452,3.322 116.6,3.174 116.6,1.276 115.075,1.276 115.142,1.343 115.142,3.651
  pour cut-out: 100.863,6.07 100.863,5.209 101.05,5.022 101.7,5.022 101.7,5.986 101.862,6.148
  pour cut-out: 77.502,15.756 80.672,15.756 80.856,15.94 80.18,16.616 80.18,16.716 77.502,16.716
  pour cut-out: 79.762,21.21 79.399,21.573 79.399,21.723 80.033,21.723 80.326,21.43 79.828,20.933 79.828,20.6
  pour cut-out: 78.492,21.21 78.728,21.21 78.815,21.124 78.815,20.6 78.332,20.6
  pour cut-out: 75.952,26.392 76.188,26.392 76.188,25.676 76.3,25.564 76.184,25.448 75.866,25.448
  pour cut-out: 74.682,26.392 74.918,26.392 75.038,26.272 75.038,25.8 74.671,25.8 74.571,25.7
  pour cut-out: 73.412,26.392 73.47,26.333 73.827,26.333 73.827,26.143 73.232,25.548 73.9,25.548
  pour cut-out: 72.142,26.392 72.378,26.392 72.437,26.333 72.437,25.7 72.316,25.7 71.907,25.291
  pour cut-out: 70.872,26.392 71.108,26.392 71.108,25.96 71.268,25.8 71.168,25.7 70.7,25.7
  pour cut-out: 59.571,8.831 60.456,8.831 60.209,9.078 60.209,9.929 59.397,9.929 59.355,9.887
  pour cut-out: 74.596,6.103 74.675,6.182 76.085,6.182 76.085,6.981 75.866,7.2 74.429,7.2
  pour cut-out: 36.988,3.883 36.613,3.509 36.613,3.5 36.294,3.5 35.472,4.322 35.584,4.434 36.866,4.434
  pour cut-out: 38.012,3.883 42.034,3.883 42.2,3.717 42.343,3.86 42.343,6.12 38.85,6.12
  pour cut-out: 34.752,6.597 34.695,6.54 34.695,5.759 34.55,5.759 34.073,5.282 33.512,5.843 33.512,5.862
  pour cut-out: 31.218,6.085 31.829,6.085 32.155,5.759 31.7,5.304 31.7,4.887 30.656,4.887 30.4,5.144
  pour cut-out: 25.597,6.203 26.3,6.203 26.3,6.7 26.185,6.815 25.718,6.815
  pour cut-out: 37.338,12.998 38.738,12.998 38.74,13 38.763,12.977 38.763,11.5 37.414,11.5 37.338,11.576
  pour cut-out: 21.426,19.004 21.426,17.045 21.4,17.02 21,17.42 21,18.415
  pour cut-out: 29.543,19.07 29.543,21.105 29.413,21.235 28.894,21.235 28.894,19.092

## Silkscreen, mask and mechanical layers (free items; w line width, h text height)
Top Overlay:
  text "JLCJLCJLCJLC" at 78.5,46.4 h1.5
  text "Russian IN-12 Tubes driver board, driven by K155ID1 ICs and 74HC595 Shift Registers" at 1.7,12.2 h2.2
  text "TOP LAYER" at 85.725,2.725 h2
Bottom Overlay:
  text "HV" at 125.7,48.4 h3
  text "BOT LAYER" at 104.05,2.775 h2
Mechanical 1:
  the board outline again, w0.1

## Text inside footprints (layer, text, board x,y; h text height)
2: Bottom Overlay "NIXIE  Driver" at 53.064,13.8 h1.52 r180
U1: Bottom Overlay "NIXIE  Driver" at 3.804,13.9 h1.52 r180
U3: Bottom Overlay "NIXIE  Driver" at 28.157,13.8 h1.52 r180
U6: Bottom Overlay "NIXIE  Driver" at 78.124,13.9 h1.52 r180
U7: Bottom Overlay "NIXIE  Driver" at 102.943,13.84 h1.52 r180
U9: Bottom Overlay "NIXIE  Driver" at 127.585,14 h1.52 r180